# Altium PCB PCB1.PcbDoc
Units mm, origin at the board's own origin, x right, y up, seen from the top; angles counter-clockwise.
Board outline 16.38 x 10.54 mm, 2 copper layers (Top Layer, Bottom Layer); 8 components, 6 nets, 23 pads, 0 vias.
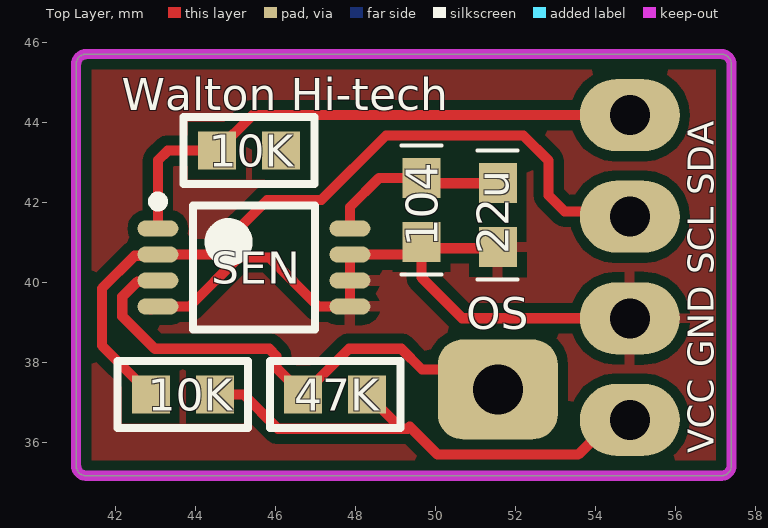
[diagram p0: Top Layer view]
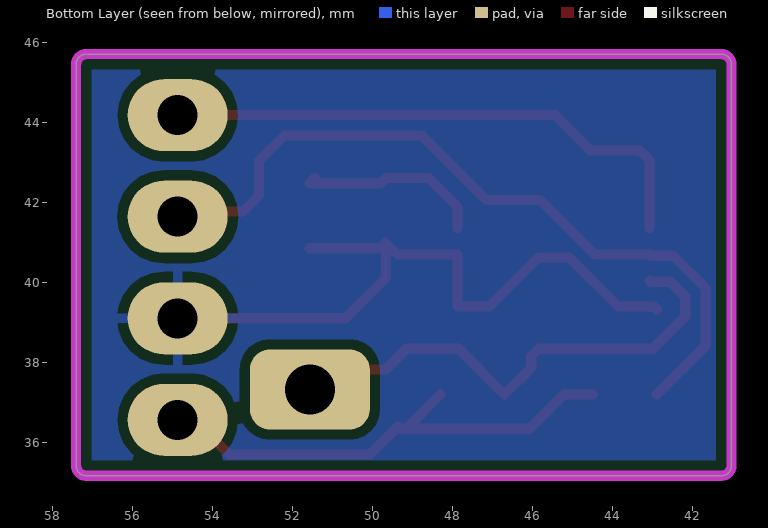
[diagram p1: Bottom Layer view, seen from below]

## Layer stack, top to bottom
Top Solder: solder mask 0.0102, Solder Resist, Dk 3.5
Top Layer: signal copper 0.0356
Dielectric 1: dielectric 0.32, FR-4, Dk 4.8
Bottom Layer: signal copper 0.0356
Bottom Solder: solder mask 0.0102, Solder Resist, Dk 3.5

## Board outline
41.021,35.433 ccw(c41.275,35.433) 41.275,35.179 57.15,35.179 ccw(c57.15,35.433) 57.404,35.433 57.404,45.466 ccw(c57.15,45.466) 57.15,45.72 41.275,45.72 ccw(c41.275,45.466) 41.021,45.466

## Design rules (kind name [scope] priority, off if disabled: settings)
Clearance [All] p1: gap=0.254 ignorepadtopadclearanceinfootprint=FALSE except(0: Arc-Hole Track-Hole SMDPad-Hole THPad-Hole Via-Hole Fill-Hole Poly-Hole Region-Hole Text-Hole)
PolygonConnect [All] p1: connectstyle=Relief reliefconductorwidth=0.254 reliefentries=4 polygonreliefangle="90 Angle" airgapwidth=0.254
RoutingVias [All] p1: holewidth=0.711 width=1.27 viastyle="Through Hole" minholewidth=0.711 minwidth=1.27 maxholewidth=0.711 maxwidth=1.27
SolderMaskExpansion [All] p1: expansion=0.102 istentingtop=FALSE
Width [All] p1: maxlimit=0.254 minlimit=0.254 preferedwidth=0.254
30 further rules are at their usual default settings.

## Classes and differential pairs
component class Design: 10K 22u 47K 104 OS SEN "VCC GND SCL SDA"

## Components (designator, comment, footprint, x,y, rotation, side; value= is the part's Value field where it differs from the comment)
10K "10KΩ" R_0603 45.339,43.307 r0 top (schematic designator R3)
10K "10KΩ" R_0603 43.688,37.211 r0 top (schematic designator R2)
22u "22uF" C_0603 51.562,40.894 r90 top (schematic designator C2)
47K "47KΩ" R_0603 47.498,37.211 r0 top (schematic designator R1)
104 "100nF" C_0603 49.657,41.021 r90 top (schematic designator C1)
OS "1P" CN_Ø1.25mm_Lead 51.562,37.338 r0 top (schematic designator CN2)
SEN "SGM452" SGM452-TSOP65P490X110-8N 45.466,40.386 r0 top (schematic designator SGM1)
"VCC GND SCL SDA" "4P 2mm 180°" CN_4Pole_2.54_Rightangle_Header 54.864,40.386 r0 top (schematic designator CN1)

## Footprints (in the part's own frame and the unit in brackets; to place one, negate y for a bottom-side part, rotate by r counter-clockwise, add the part's x,y. Pads: shape width x height; smd on the part's side, far side on the other; paste and mask are expansions set on the pad)
C_0603 [mm]
  rect 1x0.95 smd: 1(0,0) 2(1.6,0)
  silkscreen extent -0.81,-0.49 2.41,0.51, body extent -0.01,-0.45 1.69,0.45, height 0.8
CN_4Pole_2.54_Rightangle_Header [mm]
  oval 2.5x1.8 hole 1: 1(0,-3.81) 2(0,-1.27) 3(0,1.27) 4(0,3.81)
  body extent -0.32,-5.08 11,5.08, height 3.8
CN_Ø1.25mm_Lead [mm] "Lead Wire"
  rrect50% 3x2.5 / inner rrect50% 3x2 / far side rrect50% 3x2 hole 1.25: 1(0,0)
R_0603 [mm] "Chip Resistor, 2-Leads, Body 1.65x0.85mm, IPC Medium Density"
  rect 0.95x0.95 smd: 1(-0.8,0) 2(0.8,0)
  silkscreen extent -1.64,-0.84 1.63,0.84, body extent -0.89,-0.47 0.89,0.47, height 0.45
SGM452-TSOP65P490X110-8N [mm] "TSOP, 8-Leads, Body 3.00x3.00mm, Pitch 0.65mm, IPC Medium Density"
  oval 1.02x0.41 smd: 1(-2.4,0.975) 2(-2.4,0.325) 3(-2.4,-0.325) 4(-2.4,-0.975) 5(2.4,-0.975) 6(2.4,-0.325) 7(2.4,0.325) 8(2.4,0.975)
  silkscreen extent -2.52,-1.55 1.52,1.77, body extent -2.45,-1.55 2.45,1.55, height 1.1

## Part data
10K 10K 47K: library part "Resistor>> General Purpose"
22u 104: library part "Capacitor>> Non-Polar"
OS: library part "Connector>> 1Pin"
SEN: "SGM452 / Digital Temperature Sensor and / Thermal Watchdog with Two-Wire Interface"
"VCC GND SCL SDA": library part "Connector>> 4Pins"

## Nets (pads, with @x,y where several pads share a name; then routed paths per layer and width w, separated by ;. In a path a pad name is that pad's centre, name@x,y a point inside that pad or via, vN(x,y) a via of type N, cw(c..) or ccw(c..) an arc to the next point about the centre after c; other vN are vias at no path point)
GND: 22u.1 104.1 "VCC GND SCL SDA.2" SEN.4 SEN.5 SEN.6 SEN.7 | length 17.7
  Top Layer w0.254: SEN.4@42.888,39.339 42.96,39.411 SEN.4 43.856,39.411 45.085,40.64 45.847,40.64 47.076,39.411 SEN.5 SEN.6 SEN.7 49.372,40.711 49.657,40.996 49.657,40.132 50.673,39.116 54.864,39.116 ; 104.1@49.669,41.009 49.809,40.869 22u.1@51.562,40.869
NetC1_2: 22u.2 104.2 SEN.8 | length 4.8
  Top Layer w0.254: SEN.8 47.866,41.897 48.59,42.621 104.2 49.784,42.494 22u.2 22u.2@51.435,42.621
OS: 47K.1 OS.1 SEN.3 | length 13.1
  Top Layer w0.254: SEN.3 43.036,40.031 42.552,40.031 42.175,39.654 42.175,39.168 42.989,38.354 45.847,38.354 46.027,38.174 46.027,37.882 47K.1 47.841,38.354 49.149,38.354 49.667,37.836 51.064,37.836 OS.1 OS.1@51.312,37.338
SCL: 10K.1@42.888,37.211 "VCC GND SCL SDA.3" SEN.2 | length 19.7
  Top Layer w0.254: 10K.1@42.888,37.211 41.667,38.432 41.667,39.864 42.484,40.681 43.036,40.681 SEN.2 44.438,40.711 45.799,42.073 47.153,42.073 48.768,43.688 52.197,43.688 52.832,43.053 52.832,42.186 53.233,41.785 54.735,41.785 54.864,41.656 54.483,41.656
SDA: 10K.1@44.539,43.307 "VCC GND SCL SDA.4" SEN.1 | length 14
  Top Layer w0.254: SEN.1 43.066,43.066 43.307,43.307 44.539,43.307 45.428,44.196 54.864,44.196
VCC: 10K.2@44.488,37.211 47K.2 "VCC GND SCL SDA.1" | length 12.6
  Top Layer w0.254: 10K.2@44.488,37.211 45.212,37.211 45.639,36.784 45.639,36.782 46.065,36.355 49.154,36.355 ; 47K.2 49.154,36.355 ; 54.864,36.576 54.44,36.576 53.571,35.707 50.06,35.707 49.36,36.406 49.309,36.355 49.154,36.355
pads on no net: 10K.2@46.139,43.307

## Polygon pours and split planes (outlines as drawn)
GND on Top Layer "GND_L01_P000" (solid, pour order 0): 41.021,35.306 57.404,35.306 57.404,45.593 57.277,45.72 41.021,45.72 41.021,45.466
GND on Bottom Layer "GND_L02_P002" (solid, pour order 2): 41.021,45.593 57.277,45.593 57.277,35.306 41.021,35.306

## Keep-outs
Keep-Out Layer:
  the board outline again, w0.254

## Silkscreen, mask and mechanical layers (free items; w line width, h text height)
Top Overlay:
  text "Walton Hi-tech" at 42.164,44.323 h0.8